# Altium PCB PCB1.PcbDoc (part 4 of 4)
Units mil, origin at the board's own origin, x right, y up, seen from the top; angles counter-clockwise.
Board outline 3912 x 3804 mil, 4 copper layers (Top Layer, Layer 2, Layer 3, Bottom Layer), stack 23.756 mil thick; 248 components, 329 nets, 1182 pads, 457 vias.
Unrouted connection lines stored in the file: 4.
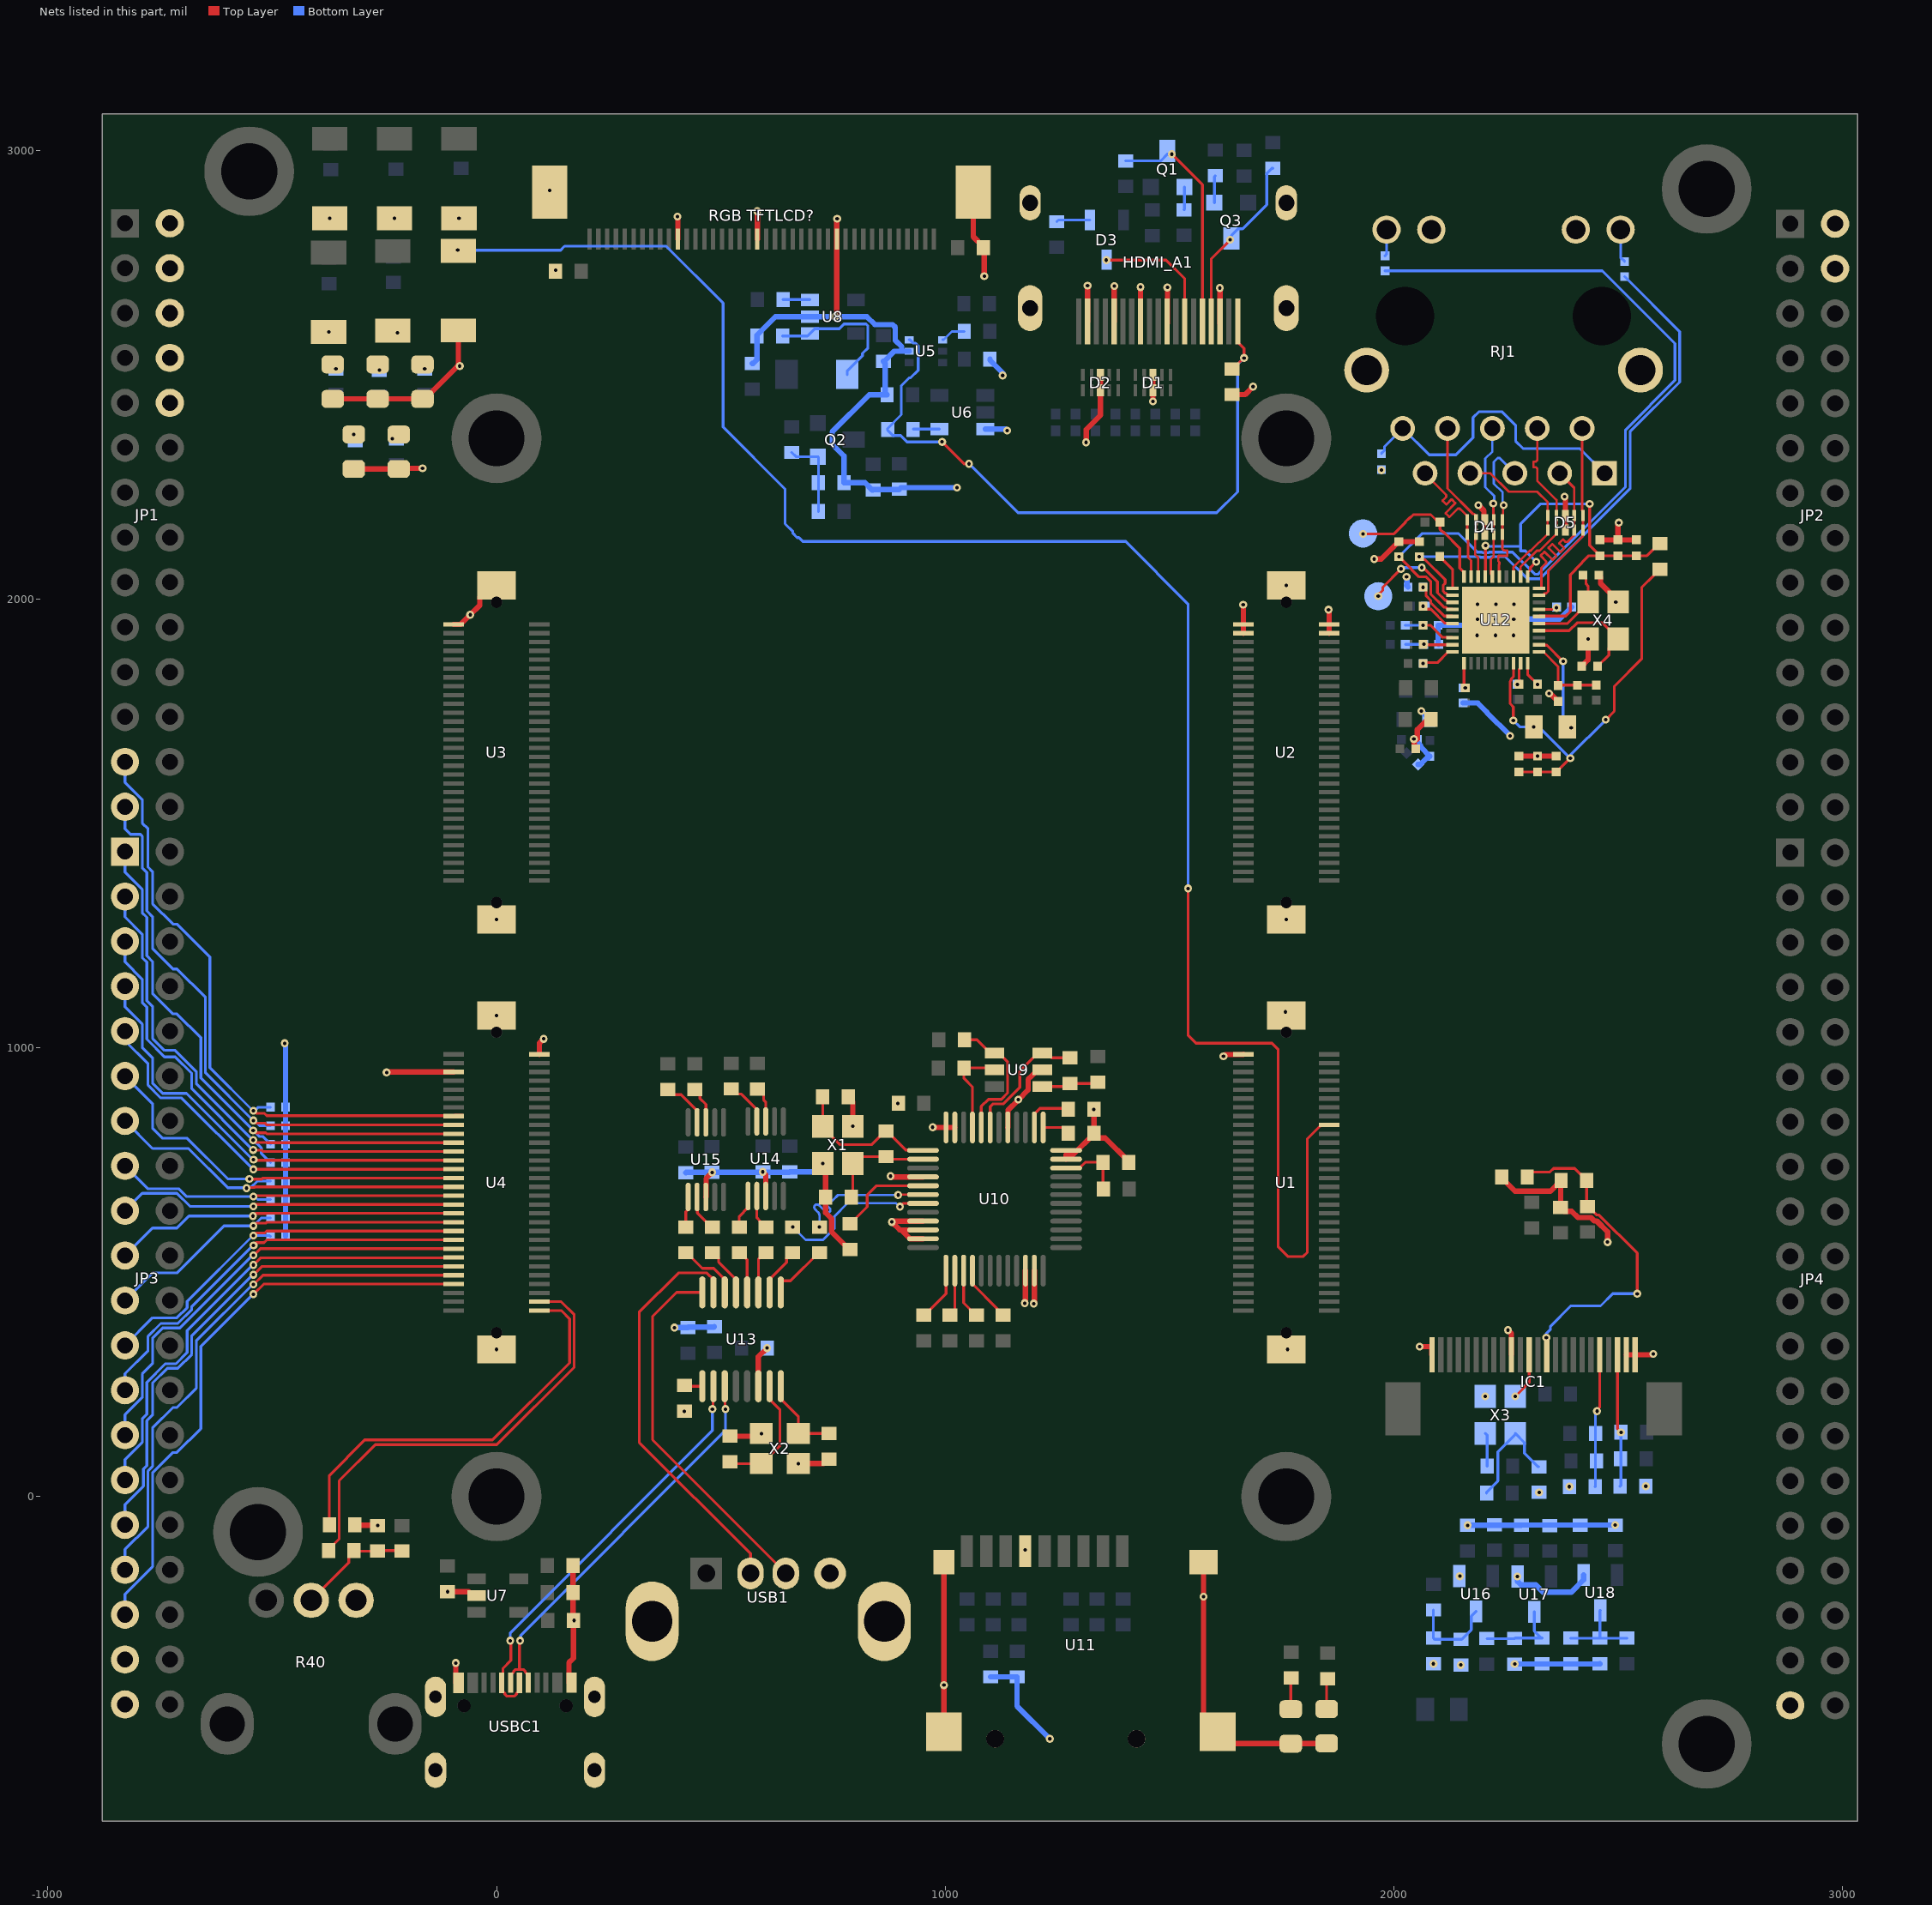
[diagram p6: the nets of this part, all layers, seen from the top]

## Via types
v1: diameter 17.7, hole 7.9, Top Layer to Bottom Layer, tented both sides, 445 vias
v2: diameter 17.7, hole 7.9, Top Layer to Bottom Layer, 12 vias

## Nets (pads, with @x,y where several pads share a name; then routed paths per layer and width w, separated by ;. In a path a pad name is that pad's centre, name@x,y a point inside that pad or via, vN(x,y) a via of type N, cw(c..) or ccw(c..) an arc to the next point about the centre after c; other vN are vias at no path point) (continued)
GND: 1.1 2.1 3.1 4.1 5.1 6.1 7.1 8.1 9.1 10.1 11.1 12.1 13.1 14.1 15.1 16.1 17.1 18.1 "RGB TFTLCD?.11" "RGB TFTLCD?.20" "RGB TFTLCD?.29" "RGB TFTLCD?.A" "RGB TFTLCD?.B" C1.2 C2.1 C3.1 C4.1 C5.1 C6.2 C7.2 C8.1 C9.1 C10.1 C12.1 C13.1 C14.2 C15.1 C16.1 C17.2 C18.2 C19.1 C20.2 C21.1 C22.1 C23.1 C24.1 C25.2 C26.1 C27.1 C28.1 C29.1 C30.1 C31.2 C32.2 C33.1 C34.1 C35.1 C36.1 C37.1 C38.1 C39.1 C40.1 C41.1 C42.2 C43.2 C44.2 C45.2 C46.1 C47.1 C48.1 D1.3 D1.8 D2.3 D2.8 D4.3 D4.8 D5.3 D5.8 HDMI_A1.2 HDMI_A1.5 HDMI_A1.8 HDMI_A1.11 HDMI_A1.17 HDMI_A1.20 HDMI_A1.21 HDMI_A1.22 HDMI_A1.23 IC1.1 IC1.2 IC1.15 IC1.24 JP1.2 JP1.4 JP1.6 JP1.8 JP1.10 JP2.2 JP2.4 JP3.37 JP3.39 JP4.39 LED1.2 LED2.2 LED3.2 LED4.2 LED5.2 LED6.2 LED7.2 R11.1 R15.1 R28.1 R40.1 R47.1 R58.1 R60.2 R88.1 R89.1 R90.1 R91.1 R92.1 R93.1 R94.1 R95.1 R97.2 R99.2 R102.1 R104.1 R107.2 R108.2 RJ1.12 RJ1.13 RJ1.B01 RJ1.B02 SW1.1 SW2.1 SW3.1 SW4.1 SW5.1 SW6.1 U1.59 U1.61 U1.62 U2.57 U2.58 U2.59 U2.60 U2.61 U2.62 U3.59 U3.61 U3.62 U4.55 U4.60 U4.61 U4.62 U5.2 U6.3 U7.2 U8.2 U9.2 U10.4 U10.9 U10.10 U10.11 U10.22 U10.23 U10.35 U10.36 U10.41 U10.47 U10.48 U11.0 U11.6 U12.41 U13.14 U14.3 U15.3 U16.1 U17.1 U18.1 USB1.4 USBC1.0 USBC1.A1 USBC1.A12 USBC1.B1 USBC1.B12 X1.2 X1.4 X2.2 X2.4 X3.2 X4.2 X4.4 | length 10092.5
  Top Layer w12: LED7.2@-365,2445.73 LED3.2@-265,2445.73 LED4.2@-165,2445.73 -160,2445.73 -87.82,2517.91 -83.09,2517.91 v1(-82,2519) -85,2522 SW6.1@-85,2598.41 ; LED6.2@-318,2289.6 LED5.2@-218,2289.6 -216.6,2291 v1(-165,2291) ; R47.1@-315.46,-63 -314.73,-63.73 -265.73,-63.73 v1(-265,-64.46) ; v1(-245,945) -243.95,946.05 U4.55@-95.46,946.05 ; v1(-109.31,-211.87) -62.25,-211.87 -53.65,-220.46 U7.2@-44.8,-220.46 ; U3.59@-95.46,1943.42 -79.9,1943.42 v1(-58.6,1964.72) -37.31,1986.02 -37.31,2004.55 -11.81,2030.05 U3.62@0,2030.05 ; USBC1.A1@-90.68,-414.82 v1(-90.68,-370.68) ; U4.60@95.47,985.42 95.47,1010.47 v1(105,1020) ; v1@118.55,2906.43 v1(118.55,2910.45) ; C40.1@131.46,2730 v1(131.46,2732.54) ; USBC1.B1@161.29,-414.76 161.29,-370 171.24,-360.05 C16.1@171.24,-275.87 v1(172.9,-275.87) ; C5.1@170.24,-153.87 170.74,-154.37 C16.1@170.74,-275.37 ; v1(403,2852) 403.98,2851.02 403.98,2802 ; v1(418.53,190) R58.1@418.53,190.46 ; U15.3@466.53,667.75 467.01,668.24 467.01,708.94 v1(480.53,722.46) ; C31.2@520.07,134.66 584.31,134.66 v1(590.12,140.46) ; v1(581,2864) 581.15,2863.85 581.15,2802 ; U13.14@583.53,246 583.53,311.46 v1(603.07,331) ; v1(593.53,723.46) 599.84,717.14 U14.3@599.84,669.75 ; v1(672.79,73.54) 729.07,73.54 739.1,83.57 C32.2@741.07,83.57 ; X1.4@733.46,735.87 C6.2@733.46,667 733.46,632.45 746.46,619.45 746.46,590.16 786.03,550.58 R28.1@788,550.58 ; v1(754.7,2629) 754.7,2630.54 758.31,2634.16 758.31,2802 758.31,2846.31 v1(759,2847) ; C7.2@784.09,891 784.09,889.03 793.93,879.19 v1(793.93,825) ; v1(878,714) 879.67,712.33 U10.4@950.43,712.33 ; v1(894,876) C4.1@895.46,876 ; U10.11@950.43,574.54 921.49,574.54 901.81,594.22 ; U10.10@950.43,594.22 901.81,594.22 ; U10.9@950.43,613.91 882.91,613.91 v1(881,612) 898.78,594.22 901.81,594.22 ; v1(972,823) 972.43,822.57 U10.48@1001.61,822.57 U10.47@1021.3,822.57 ; U11.0@997,-523.95 v1(997,-420) U11.0@997,-146 ; 1062.43,2906.43 1062.43,2807.08 1084.54,2784.97 C42.2@1084.54,2783 1087,2780.54 v1(1087,2719) ; U11.0@1103.77,-539.7 U11.0@1111.17,-539.7 ; U10.41@1139.41,822.57 1139.9,823.05 1139.9,860.9 1163.03,884.03 v1(1163.03,884.38) 1184.65,906.01 1184.65,929.56 1191.8,936.7 1192.17,936.7 1206.47,951 U9.2@1216.31,951 ; v1(1177,431) 1178.78,432.78 U10.22@1178.78,503.67 ; U11.6@1178.1,-121.32 v1(1178.1,-118.9) ; v1(1197,430) 1198.46,431.46 U10.23@1198.46,503.67 ; U10.35@1269.33,751.7 1269.33,761.54 1284.6,761.54 C18.2@1331.09,808.03 ; v1(1314,2349) 1314,2377.44 1346,2409.44 D2.8@1346,2464.75 D2.3@1346,2499 ; v1(1317,2698) 1317.15,2697.85 HDMI_A1.2@1317.15,2618 ; C17.2@1331.54,863 v1(1331.31,862.77) 1331.31,810.23 C18.2@1331.09,810 C18.2@1331.09,808.03 ; HDMI_A1.5@1376.2,2618 v1@1376.2,2696.2 ; C19.1@1408.54,745 1408.54,746.97 1356.24,799.27 1339.85,799.27 C18.2@1331.09,808.03 ; U11.0@1426.13,-539.7 U11.0@1433.54,-539.7 ; HDMI_A1.8@1435.15,2615 v1@1435.15,2694.85 ; v1(1463,2440) D1.8@1463,2464.75 D1.3@1463,2499 ; HDMI_A1.11@1495.15,2614 v1@1495.15,2693.85 ; U11.0@1575.74,-146 v1(1575.74,-223) 1575.74,-492.46 U11.0@1607.24,-523.95 1633.68,-550.4 LED2.2@1770,-550.4 1770.2,-550.2 1849.8,-550.2 LED1.2@1850,-550 ; HDMI_A1.17@1612.15,2613 v1@1612.15,2692.85 ; v1(1620,981) 1623.9,984.9 1664.01,984.9 U1.59@1664.54,985.42 ; R11.1@1639,2455.46 1668.46,2455.46 v1(1686,2473) ; v1(1664,1987) 1664.54,1986.46 U2.59@1664.54,1943.42 U2.57@1664.54,1923.74 ; U1.61@1760,327.95 v1(1763.05,327.95) ; v1(1854,1976) 1855.47,1974.53 U2.60@1855.47,1943.42 U2.58@1855.47,1923.74 ; v1(1956,2089) 1971.9,2089 1998.31,2115.41 1998.67,2115.41 R97.2@2011,2127.73 R99.2@2056.5,2127.73 ; v1(2044.31,1687.89) 2045.4,1686.8 2045.4,1669.32 C44.2@2048.72,1666 ; v1@2051.72,1687.89 2051.72,1709.05 2071.81,1729.14 2073.78,1729.14 2082.54,1737.91 C43.2@2082.54,1739.87 ; v1(2057,334) 2084.54,334 2084.63,333.91 IC1.24@2084.63,316 ; v1(2188,2209) 2200.57,2196.43 2200.57,2178.43 D4.8@2202.44,2176.56 D4.3@2202.44,2144.15 ; 1.1@2239.91,712 2239.91,710.03 2269.64,680.31 2348.76,680.31 2361.72,693.27 2363.69,693.27 2.1@2371.73,701.3 ; v1(2254,371) 2261.7,363.3 2261.7,316.09 IC1.15@2261.79,316 ; C34.1@2278.5,1649.84 v1(2320,1649.84) C33.1@2361.5,1649.84 ; v1(2345.91,1789.38) 2346.19,1789.38 2347.2,1790.38 C41.1@2365.87,1771.71 ; 2.1@2372.46,704 2371.73,703.27 2.1@2371.73,701.3 ; v1(2380,2228) 2382,2226 D5.8@2382,2186 D5.3@2382,2153.6 ; C39.1@2418.28,1850 2432.49,1864.21 v1(2432.49,1910.6) ; C38.1@2456.72,2053 2460.56,2049.16 2460.56,2034.1 2499.42,1995.24 X4.2@2499.42,1993.28 v1(2494.28,1993.28) ; C30.1@2459.13,2131.72 C29.1@2499,2131.72 ; v2(2476,567) 2476,590.09 2451.87,614.22 2446.79,614.22 2439.23,621.78 2410.13,621.78 2396.13,635.78 2379.76,635.78 3.1@2371,644.54 2371.73,645.27 2.1@2371.73,701.3 ; v1(2501,2170) 2499,2168 C29.1@2499,2131.72 ; IC1.2@2517.7,316 2537.24,316 IC1.1@2537.3,315.94 2575.94,315.94 v1(2578,318) ; C28.1@2540.13,2131.72 C29.1@2499,2131.72
  Bottom Layer w12: v1(-472,1010) -470,1008 R88.1@-470,867.57 R89.1@-470,826.43 R90.1@-470,785.29 R91.1@-470,744.14 R92.1@-470,703 R94.1@-470,620.71 R95.1@-470,579.57 ; v1(396.54,376.54) C23.1@426.53,376.54 427.53,377.54 484.53,377.54 C24.1@485.53,378.54 ; C27.1@421.65,721.46 422.65,722.46 v1(480.53,722.46) 652.53,722.46 C36.1@653.53,723.46 707.89,723.46 726.76,742.32 v1(727,742.32) ; C8.1@569.87,2524.54 571.57,2524.54 580.33,2533.31 C9.1@580.33,2586 580.33,2587.97 621.36,2629 U8.2@698.41,2629 v1(754.7,2629) 825.35,2629 843.04,2611.31 882.75,2611.31 888.61,2605.45 888.61,2576.44 902.99,2562.06 902.99,2552 ; U5.2@919.6,2552 902.99,2552 ; v1(1026,2248) 901.54,2248 C13.1@898,2244.46 897.23,2243.69 839.77,2243.69 C12.1@839,2242.91 837.03,2242.91 820.94,2259 R15.1@774.54,2259 774.54,2318.59 748,2345.14 748,2372.36 830.64,2455 C2.1@870.46,2455 866.17,2459.29 866.17,2525.17 C3.1@861.87,2529.46 863.84,2529.46 886.39,2552 902.99,2552 ; U6.3@1089.18,2378.6 1134.4,2378.6 v1(1138,2375) ; C1.2@1099.54,2534 1099.54,2532.03 1128,2503.57 v1(1128,2498) ; C21.1@1101,-401.54 C22.1@1160,-401.54 1160,-466.7 v1(1233,-539.7) ; v1(1972,2287) C14.2@1972,2288.28 ; v1(2028,2049.19) 2029.09,2048.1 2029.09,2030.34 2028.78,2030.04 2028,2030.04 R107.2@2031.54,2026.5 ; C47.1@2046.72,1686.87 2045.7,1687.89 v1(2044.31,1687.89) 2060.16,1672.04 2060.16,1669.13 C45.2@2080,1649.28 2076.16,1645.44 2072.93,1645.44 2058.96,1631.47 C48.1@2053.53,1631.47 ; v1(2061.05,1750.46) C46.1@2079.51,1732 ; R102.1@2099.55,1899 2098.17,1900.38 R104.1@2098.17,1941.5 2170.96,1941.5 2184.46,1955 v1(2186,1955) ; U16.1@2145.6,-177.26 v1(2146.74,-177.26) ; R108.2@2154,1768.27 2186.83,1768.27 2207,1748.1 2207,1747 v1(2259,1695) ; v1(2164,-64) 2164.27,-63.73 2283.73,-63.73 14.1@2284,-63.46 17.1@2415,-63.46 v1(2493,-63.46) ; v1(2267,1955) 2369.09,1955 2383.4,1969.31 2383.4,1969.67 R60.2@2395.73,1982 ; v1(2269,-373.09) 2269.27,-372.82 2458.73,-372.82 15.1@2459,-372.54 ; v1(2275.2,-178) 2275.2,-188.83 2282.98,-196.61 2316.08,-196.61 2332.08,-212.61 2395.39,-212.61 2422.51,-185.48 U18.1@2422.51,-174.66 ; 5.1@2323,9.46 v1(2323.46,9.46) ; v1(2345.91,1789.38) v1@2346.83,1790.3
  other v1: 2149,-375.09 2088,-372.54 2391,22.13 2561.09,23.13 2203.54,223.34 0,327.95 0,1072.05 1758,1080 0,1285.95 1760,1285.95 2185.5,1919 2226,1919 2266.5,1919 2226.5,1955 2186.5,1988 2227,1988 2267.5,1988 1760,2030.05 -221,2593 -374,2594.83 1612,2693 1495,2694 1435,2695 1377,2697 -371.91,2848.25 -227.74,2848.25 -83.57,2848.25
HDMI_SCL_LS: HDMI_A1.15 Q1.3 R20.2 | length 510.4
  Top Layer w6.16: v1(1504.99,2991.01) 1573.06,2922.94 HDMI_A1.15@1573.06,2618
  Bottom Layer w6.16: R20.2@1402,2976.09 1480.08,2976.09 1495,2991.01 v1(1504.99,2991.01)
HDMI_SDA_LS: HDMI_A1.16 Q3.3 R29.2 | length 401.4
  Top Layer w6.16: HDMI_A1.16@1592.74,2618 1592.74,2757.97 v1(1635,2800.23)
  Bottom Layer w6.16: Q3.3@1637.79,2803.02 1637.79,2810.02 1652.71,2824.94 1662.73,2824.94 1716.35,2878.56 1716.35,2947.77 1728.03,2959.46 R29.2@1730,2959.46
JTAG_DM: R71.2 U10.6 | length 351.3
  Top Layer w5.24: v1(895,672) 895.96,672.96 U10.6@950.43,672.96
  Bottom Layer w5.24: v1(719.73,600.54) 719.73,622.57 719.73,626.27 ; 719.73,626.32 ccw(c709.28,626.27) 716.69,633.64 709.85,640.48 cw(c714.18,644.81) 709.85,649.13 cw(c714.18,644.81) 718.5,649.13 733.61,634.03 ccw(c737.94,638.35) 742.26,634.03 ccw(c737.94,638.35) 742.26,642.68 732.64,652.3 cw(c736.97,656.63) 732.64,660.96 cw(c736.97,656.63) 741.3,660.96 ccw(c745.63,665.28) 749.96,660.96 761,672 762,672 v1(895,672)
JTAG_DP: R69.2 U10.7 | length 358.1
  Top Layer w5.24: v1(899,646) 906.28,653.28 U10.7@950.43,653.28
  Bottom Layer w5.24: v1(660.13,600.54) 688.67,572 727.6,572 753,597.4 753,624.13 782.87,654 889.7,654 897.7,646 v1(899,646)
JTAG_ROM_CLK: R22.2 U9.4 U10.44 | length 303.9
  Top Layer w6.16: R22.2@1043,1018 1070.56,1018 1100.16,988.4 U9.4@1110,988.4 1119.84,988.4 1138.73,969.51 1138.73,898.86 1124.88,885 1096,885 1080.35,869.35 U10.44@1080.35,822.57
JTAG_ROM_CS: R24.2 U9.5 U10.45 | length 210.5
  Top Layer w6.16: U10.45@1060.67,822.57 1060.67,912.33 1041.54,931.46 R24.2@1041.54,955 1106,955 U9.5@1110,951
JTAG_ROM_DATA: R19.1 U9.3 U10.43 | length 299.6
  Top Layer w6.16: U10.43@1100.04,822.57 1100.04,869.04 1105.84,874.84 1129.08,874.84 1166,911.76 1166,947.93 1206.47,988.4 U9.3@1216.31,988.4 1226.15,988.4 1237.01,977.54 R19.1@1278,977.54
LED_10_100: R96.1 U12.21 | length 82.5
  Top Layer w6.16: R96.1@2102,2094.54 2130.54,2065.99 U12.21@2130.54,2023.87
LED_1000: R25.1 R99.1 U12.22 | length 1274.3
  Top Layer w6.16: v1(2056.5,2094.27) 2063.26,2087.51 2069.49,2087.51 2113.83,2043.17 2113.83,2034.88 2109.68,2030.74 2109.68,2017 2113.83,2012.85 2115.97,2012.85 2119.84,2008.98 2129.69,2008.98 U12.22@2130.54,2008.12
  Bottom Layer w6.16: v1(2056.5,2094.27) 2191.68,2094.27 2193.19,2092.75 2214.81,2092.75 2216.32,2094.27 2248.13,2094.27 2297.34,2045.06 2325.43,2045.06 2526.16,2245.79 2526.16,2372.79 2636.56,2483.19 2636.56,2595.71 R25.1@2514,2718.27
LED_ACT: R26.1 R97.1 U12.24 | length 1908.8
  Top Layer w6.16: v1(2011,2094.27) 2022.28,2082.99 2056.1,2049.18 2072.02,2049.18 2081.92,2039.28 2081.92,2011.14 2111.71,1981.35 2115.97,1981.35 2119.84,1977.48 2129.69,1977.48 U12.24@2130.54,1976.62
  Bottom Layer w6.16: R26.1@1980,2731.27 2464.2,2731.27 2626.4,2569.07 2626.4,2487.4 2516,2377 2516,2250 2321.22,2055.22 2313.63,2055.22 2264.42,2104.43 2212.11,2104.43 2210.6,2102.91 2197.4,2102.91 2195.89,2104.43 2185.34,2104.43 2144.18,2145.59 2062.32,2145.59 v1(2011,2094.27)
MGT_CLK0_N: JP3.31 U4.11 | length 1144.6
  Top Layer w6.16: v1(-542,494.44) -541.17,494.44 -522.63,512.98 U4.11@-95.47,512.98
  Bottom Layer w6.16: JP3.31@-828,-63 -828,-17.55 -786.9,23.55 -786.9,61.4 -779.26,69.03 -779.26,169.03 -766.58,181.72 -766.58,252.98 -733.82,285.74 -710.34,285.74 -679.26,316.81 -679.26,358.41 -543.24,494.44 v1(-542,494.44)
MGT_CLK0_P: JP3.29 U4.13 | length 1064.7
  Top Layer w6.16: v1(-542,516.14) -541.18,516.14 -525.15,532.17 U4.13@-96.06,532.17
  Bottom Layer w6.16: JP3.29@-828,37 -828,82.45 -789.42,121.02 -789.42,173.24 -779.26,183.4 -779.26,254.66 -738.03,295.9 -714.55,295.9 -689.42,321.02 -689.42,369.95 -543.24,516.14 v1(-542,516.14)
MGT_CLK1_N: JP3.19 U4.23 | length 771.5
  Top Layer w6.16: v1(-542.83,625.05) -542,625.05 -536.23,630.82 -512.27,630.82 -512,631.09 U4.23@-95.46,631.09
  Bottom Layer w6.16: JP3.19@-828,537 -766.58,598.42 -712.02,598.42 -685.4,625.05 v1(-542.83,625.05)
MGT_CLK1_P: JP3.17 U4.25 | length 762.1
  Top Layer w6.16: v1(-542,646.75) -537.97,650.78 U4.25@-95.46,650.78
  Bottom Layer w6.16: JP3.17@-828,637 -789.42,675.58 -712.02,675.58 -683.19,646.75 v1(-542,646.75)
MGT_RX_N_0: JP3.1 R90.2 U4.41 | length 1254.6
  Top Layer w6.16: v1@-549.71,814.11 -544.21,814.11 -542,816.32 -536.23,810.55 -514.29,810.55 -512,808.26 U4.41@-95.46,808.26
  Bottom Layer w6.16: JP3.1@-828,1437 -828,1391.55 -789.42,1352.98 -789.42,1300.76 -779.26,1290.6 -779.26,1204.97 -766.58,1192.28 -766.58,1121.02 -721.13,1075.58 -712.02,1075.58 -658.94,1022.5 -658.94,932.43 v1(-542.41,815.9) ; v1@-542,816.32 -527.98,802.3 -520.48,802.3 R90.2@-503.46,785.29
MGT_RX_N_1: JP3.15 R93.2 U4.27 | length 820.5
  Top Layer w6.16: v1(-542,668.45) -539.99,670.46 U4.27@-95.46,670.46 U4.27@-77.74,670.46
  Bottom Layer w6.16: JP3.15@-828,737 -776.74,685.74 -707.81,685.74 -690.52,668.45 v1(-542,668.45) -538.88,668.45 -532.29,661.86 R93.2@-503.72,661.86
MGT_RX_N_2: JP1.25 R88.2 U4.45 | length 1415.9
  Top Layer w6.16: v1(-542,859.72) -536.23,853.95 -517.4,853.95 -512,848.55 U4.45@-94.54,848.55 ; U4.45@-95.46,847.63 U4.45@-94.54,848.55 ; U4.45@-75.73,849.47 -93.62,849.47 U4.45@-94.54,848.55
  Bottom Layer w6.16: JP1.25@-828,1637 -828,1591.55 -789.42,1552.98 -789.42,1500.76 -776.74,1488.08 -776.74,1402.44 -766.58,1392.28 -766.58,1321.02 -721.13,1275.58 -712.02,1275.58 -638.62,1202.18 -638.62,955.51 -542.83,859.72 v1(-542,859.72) -538.88,859.72 -531.02,867.57 R88.2@-503.46,867.57
MGT_RX_N_3: JP3.23 R95.2 U4.19 | length 891.4
  Top Layer w6.16: v1@-545.12,581.65 v1(-542,581.65) -536.23,587.42 -516.31,587.42 -512,591.72 U4.19@-95.47,591.72 U4.19@-93.63,589.88
  Bottom Layer w6.16: JP3.23@-828,337 -766.58,398.42 -712.02,398.42 -689.42,421.02 -689.42,435.05 -542.83,581.65 v1(-542,581.65) -505.54,581.65 R95.2@-503.46,579.57
MGT_RX_P_0: JP3.3 R91.2 U4.39 | length 1191
  Top Layer w6.16: v1(-542.41,794.2) -541.59,794.2 -536.23,788.85 -512.28,788.85 -512,788.57 U4.39@-95.46,788.57
  Bottom Layer w6.16: JP3.3@-828,1337 -828,1291.55 -789.42,1252.98 -789.42,1200.76 -779.26,1190.6 -779.26,1104.97 -766.58,1092.28 -766.58,1021.02 -739.74,994.18 -716.26,994.18 -669.1,947.03 -669.1,920.06 -543.24,794.2 v1(-542.41,794.2) ; v1@-542,794.62 -524.23,776.85 -524.23,764.91 R91.2@-503.46,744.14
MGT_RX_P_1: JP3.13 R92.2 U4.29 | length 856.3
  Top Layer w6.16: v1(-557.28,687.11) -555.49,688.91 -538.91,688.91 -537.67,690.15 U4.29@-95.46,690.15
  Bottom Layer w6.16: JP3.13@-828,837 -766.58,775.58 -686.58,775.58 -599,688 -558.16,688 v1(-557.28,687.11) -555.07,689.32 -546.74,689.32 -533.06,703 R92.2@-503.46,703
MGT_RX_P_2: JP1.27 R89.2 U4.43 | length 1330.1
  Top Layer w6.16: v1(-542,838.02) -536.23,832.25 -516.3,832.25 -512,827.94 U4.43@-95.46,827.94
  Bottom Layer w6.16: JP1.27@-828,1537 -828,1488.1 -815.47,1475.58 -793.57,1475.58 -789.42,1471.43 -789.42,1400.76 -779.26,1390.6 -779.26,1304.97 -766.58,1292.28 -766.58,1221.02 -721.13,1175.58 -712.02,1175.58 -648.78,1112.34 -648.78,943.97 -542.83,838.02 v1(-542,838.02) -539.59,838.02 -528.01,826.43 R89.2@-503.46,826.43
MGT_RX_P_3: JP3.21 R94.2 U4.21 | length 853.1
  Top Layer w6.16: v1(-542,603.35) -536.23,609.12 -514.29,609.12 -512,611.4 U4.21@-95.47,611.4 U4.21@-93.63,613.25
  Bottom Layer w6.16: JP3.21@-828,437 -766.58,498.42 -712.02,498.42 -607.1,603.35 v1(-542,603.35) -524.63,620.71 R94.2@-503.46,620.71
MGT_TX_N_0: JP3.9 U4.33 | length 900.6
  Top Layer w6.16: v1(-542.01,729.11) -541.8,729.31 -95.67,729.31 U4.33@-95.46,729.52
  Bottom Layer w6.16: JP3.9@-828,1037 -828,1015.52 -776.74,964.25 -776.74,916.81 -748.19,888.26 -701.58,888.26 -542.42,729.11 v1(-542.01,729.11)
MGT_TX_N_1: JP3.35 U4.7 | length 1294
  Top Layer w6.16: v1(-542,451.04) -541.17,451.04 -518.6,473.61 U4.7@-95.47,473.61
  Bottom Layer w6.16: JP3.35@-828,-263 -828,-217.55 -766.58,-156.13 -766.58,52.98 -721.13,98.42 -712.02,98.42 -658.94,151.5 -658.94,334.5 -542.41,451.04 v1(-542,451.04)
MGT_TX_N_2: JP3.5 U4.37 | length 1045.5
  Top Layer w6.16: v1(-542.41,772.5) -541.88,771.97 -523.5,771.97 -520.42,768.89 U4.37@-95.46,768.89
  Bottom Layer w6.16: JP3.5@-828,1237 -828,1191.55 -789.42,1152.98 -789.42,1100.76 -779.26,1090.6 -779.26,1019.34 -739.74,979.82 -716.26,979.82 -679.26,942.82 -679.26,908.52 -543.24,772.5 v1(-542.41,772.5)
MGT_TX_N_3: JP3.27 U4.15 | length 995.1
  Top Layer w6.16: v1(-542.01,537.84) -540.75,537.84 -526.24,552.35 U4.15@-95.47,552.35
  Bottom Layer w6.16: JP3.27@-828,137 -828,182.45 -789.42,221.02 -789.42,273.24 -766.58,296.08 -766.58,352.98 -743.98,375.58 -705.5,375.58 -543.24,537.84 v1(-542.01,537.84)
MGT_TX_P_0: JP3.11 U4.31 | length 860.6
  Top Layer w6.16: v1(-550.77,707.82) -550.36,707.41 -523.25,707.41 -520.83,709.83 U4.31@-95.47,709.83
  Bottom Layer w6.16: JP3.11@-828,937 -766.58,875.58 -766.58,821.02 -743.98,798.42 -689.42,798.42 -598.82,707.82 v1(-550.77,707.82)
MGT_TX_P_1: JP3.33 U4.9 | length 1215.3
  Top Layer w6.16: v1(-542,472.74) -541.17,472.74 -520.61,493.3 U4.9@-95.47,493.3
  Bottom Layer w6.16: JP3.33@-828,-163 -828,-117.55 -776.74,-66.29 -776.74,57.19 -766.58,67.35 -766.58,152.98 -721.13,198.42 -712.02,198.42 -669.1,241.34 -669.1,346.87 -543.24,472.74 v1(-542,472.74)
MGT_TX_P_2: JP3.7 U4.35 | length 983.7
  Top Layer w6.16: v1(-541.59,750.8) -539.99,749.2 U4.35@-95.46,749.2
  Bottom Layer w6.16: JP3.7@-828,1137 -828,1091.55 -789.42,1052.98 -789.42,1000.76 -766.58,977.92 -766.58,921.02 -743.98,898.42 -690.86,898.42 -543.24,750.8 v1(-541.59,750.8)
MGT_TX_P_3: JP3.25 U4.17 | length 916.1
  Top Layer w6.16: v1(-541.59,559.53) -541.59,560.36 -536.23,565.72 -518.32,565.72 -512,572.04 U4.17@-95.47,572.04
  Bottom Layer w6.16: JP3.25@-828,237 -828,273.95 -776.74,325.21 -776.74,357.19 -748.19,385.74 -710.34,385.74 -679.26,416.81 -679.26,423.51 -543.24,559.53 v1(-541.59,559.53)
Net1_2: 1.2 2.2 FB1.2 IC1.11 | length 703.5
  Top Layer w6.16: 1.2@2289.64,712.82 1.2@2291.03,714.21 ; 1.2@2298.58,723.21 2347.65,723.21 2355.44,731 2402.54,731 2415.89,717.65 2417.86,717.65 2429.54,705.97 2.2@2429.54,704 2429.54,649.97 FB1.2@2431.98,647.53 ; FB1.2@2431,646.54 2432.97,646.54 2452.21,627.3 2457.29,627.3 2542,542.59 v2(2542,452)
  Bottom Layer w6.16: v1(2339.61,354.39) 2338.9,355.09 2338.9,362.7 2348.71,372.51 2348.71,379.71 2394,425 2460.43,425 2487.43,452 v2(2542,452)
Net4_2: 4.2 IC1.5 R83.1 R87.1 | length 298.2
  Top Layer w6.16: v1(2452.42,190.29) 2452.42,193.41 2458.64,199.63 IC1.5@2458.64,316
  Bottom Layer w6.16: 4.2@2448.09,22.13 2449.09,23.13 R87.1@2449.09,141.13 2449.09,186.95 v1(2452.42,190.29)
Net5_2: 5.2 FB3.2 X3.4 | length 256.2
  Bottom Layer w6.16: FB3.2@2206.46,8 2206.46,9.97 2231.49,35 2231.49,99.72 2270.46,138.69 X3.4@2270.46,140.66 2291.01,120.12 2291.01,96.57 2321.03,66.54 5.2@2323,66.54
Net6_2: 6.2 IC1.3 R85.1 R86.1 | length 297
  Top Layer w6.16: IC1.3@2498.01,316 2498.01,151.12 v1(2506,143.13)
  Bottom Layer w6.16: 6.2@2504,23.13 2506,25.13 v1(2506,143.13)
Net7_2: 7.2 8.2 FB4.1 U16.3 | length 202.2
  Bottom Layer w6.16: FB4.1@2088,-252.54 8.2@2088,-315.46 2090.54,-318 7.2@2149,-318 2150.97,-318 2172.3,-296.67 2172.3,-266.7 U16.3@2183,-256
Net11_2: 11.2 12.2 FB5.1 U17.3 | length 188.3
  Bottom Layer w6.16: FB5.1@2207,-316.46 2268.54,-316.46 11.2@2269,-316 2270,-315 12.2@2328.03,-315 ; U17.3@2312.6,-256.74 2312.6,-299.57 12.2@2328.03,-315 ; 12.2@2330,-315 12.2@2328.03,-315
Net15_2: 15.2 16.2 FB8.1 U18.3 | length 187.4
  Bottom Layer w6.16: 16.2@2394,-315.46 15.2@2459,-315.46 ; U18.3@2459.91,-253.39 2459,-254.31 15.2@2459,-315.46 ; FB8.1@2519,-315.46 15.2@2459,-315.46
NetC6_1: C6.1 R23.1 U10.2 X1.1 | length 241.9
  Top Layer w6.16: C6.1@790.54,667 793.93,670.39 X1.1@793.93,742.32 809.06,757.46 R23.1@868,757.46 873.76,751.7 U10.2@950.43,751.7
NetC7_1: C7.1 R23.2 U10.1 X1.3 | length 338.1
  Top Layer w6.16: C7.1@727,891 X1.3@727,825 727,823.03 766.03,784 835.49,784 866.03,814.54 R23.2@868,814.54 869.97,814.54 912.19,772.32 949.5,772.32 U10.1@950.43,771.39
NetC9_2: C9.2 F1.1 U8.1 | length 330.2
  Bottom Layer w6.16: C9.2@637.42,2586 692.81,2586 709.11,2602.3 764.13,2602.3 774.29,2612.46 823.39,2612.46 827.54,2608.31 827.54,2559.26 815.42,2547.14 815.42,2541.54 781.37,2507.5 F1.1@781.37,2500
NetC11_2: C11.2 Q2.1 R15.2 R16.1 | length 184.5
  Bottom Layer w6.16: C11.2@658,2326.46 667.46,2317 Q2.1@716,2317 717.46,2315.54 R15.2@717.46,2259 R16.1@717.46,2195
NetC14_1: C14.1 RJ1.1 RJ1.10 | length 693.7
  Bottom Layer w6.16: C14.1@1972,2323.72 1978.76,2330.48 1978.76,2339.47 RJ1.10@2019.29,2380 2078.29,2321 2138,2321 2176,2359 2176,2404 2189,2417 2241,2417 2271,2387 2271,2352 2288,2335 2414.29,2335 RJ1.1@2469.29,2280
NetC17_1: C17.1 U10.38 | length 112
  Top Layer w6.16: U10.38@1198.46,822.57 1198.46,852.49 1211.06,865.08 1237.83,865.08 1237.88,865.03 1272.43,865.03 C17.1@1274.46,863
NetC18_1: C18.1 U10.37 | length 61.6
  Top Layer w6.16: U10.37@1218.15,822.57 1262.32,822.57 1274,810.88 C18.1@1274,810
NetC19_2: C19.2 R32.1 U10.34 | length 147.9
  Top Layer w6.16: U10.34@1269.33,732.02 1299.25,732.02 1312.24,745 C19.2@1351.46,745 1351.46,686 R32.1@1352.46,685
NetC20_1: C20.1 R37.1 R39.1 R40.2 | length 255.7
  Top Layer w6.16: R40.2@-413,-231 -329.14,-147.14 -329.14,-131.68 R39.1@-318.44,-120.98 ; R39.1@-316.15,-123.27 -314.43,-121.54 C20.1@-265,-121.54 ; C20.1@-265,-120 -212.54,-120 R37.1@-211,-121.54
NetC28_2: C28.2 C29.2 C30.2 FB2.1 U12.6 U12.11 U12.17 | length 978.3
  Top Layer w6.16: U12.17@2203.38,2049.46 2203.69,2049.77 2203.69,2118.53 v1(2204,2118.84) ; U12.11@2297.87,2049.46 2297.87,2059.3 2304.21,2065.64 2304.21,2070.21 v1(2317,2083) ; U12.6@2323.46,1960.87 2324.31,1961.73 2337.64,1961.73 2337.76,1961.86 2382.89,1961.86 2393.02,1971.98 2393.02,2053.44 2404.36,2064.79 2404.36,2066.36 2434.28,2096.28 C30.2@2459.13,2096.28 ; v1(2436,2212) 2436,2119.41 C30.2@2459.13,2096.28 ; FB2.1@2593,2123.54 2591.03,2123.54 2563.77,2096.28 C28.2@2540.13,2096.28 C29.2@2499,2096.28 C30.2@2459.13,2096.28
  Bottom Layer w6.16: v1(2204,2118.84) 2205.84,2117 2282,2117 ; v1(2317,2083) 2293,2107 2282,2107 2282,2117 ; v1(2436,2212) 2327,2212 2282,2167 2282,2117
NetC31_1: C31.1 U13.15 X2.3 | length 272
  Top Layer w6.16: C31.1@520.07,77.57 524.11,73.54 X2.3@590.12,73.54 592.08,73.54 631.45,112.91 631.45,194.35 608.53,217.28 U13.15@608.53,246
NetC32_1: C32.1 U13.16 X2.1 | length 190.2
  Top Layer w6.16: U13.16@633.53,246 633.53,217.28 672.79,178.01 X2.1@672.79,140.46 672.99,140.66 C32.1@741.07,140.66
NetC33_2: C33.2 C34.2 C35.2 FB2.2 L1.2 U12.38 | length 922.4
  Top Layer w6.16: v1(2265.91,1729.11) 2265.91,1759.66 2258.8,1766.77 2258.8,1816.33 2260.78,1818.31 2260.78,1821.21 2266.37,1826.8 U12.38@2266.37,1856.54 ; C34.2@2278.5,1614.41 C35.2@2320,1614.41 C33.2@2361.5,1614.41 2392.09,1645 v1(2393,1645) ; v1(2472,1731) 2491,1750 2491,1805 2552,1866 2552,2025.46 2579.35,2052.8 2579.35,2054.77 2591.03,2066.46 FB2.2@2593,2066.46
  Bottom Layer w6.16: v1(2265.91,1729.11) 2280.02,1715 v1(2311.6,1715) 2313.81,1712.79 2325.21,1712.79 v1(2393,1645) ; v1@2392.05,1651.05 v1(2472,1731)
NetC38_2: C38.2 U12.5 X4.3 | length 194.5
  Top Layer w6.16: U12.5@2323.46,1945.13 2386.31,1945.13 2432.49,1991.31 2432.49,2028.79 2428.05,2033.23 2428.05,2046.24 C38.2@2421.28,2053
NetC39_2: C39.2 U12.4 X4.1 | length 279
  Top Layer w6.16: U12.4@2323.46,1929.38 2390.33,1929.38 2407.95,1947 2464.98,1947 2499.42,1912.57 X4.1@2499.42,1910.6 2478.88,1890.06 2478.88,1875.16 C39.2@2453.72,1850
NetC41_2: C41.2 R98.2 R100.2 U12.1 | length 183.7
  Top Layer w6.16: U12.1@2323.46,1882.13 2333.3,1882.13 2365.87,1849.56 C41.2@2365.87,1807.14 2366.89,1808.16 R98.2@2450.87,1808.16
NetD3_1: D3.1 R9.1 | length 75.2
  Bottom Layer w6.16: R9.1@1248.69,2840.54 1252.43,2844.29 D3.1@1322.28,2844.29
NetD3_3: D3.3 HDMI_A1.13 | length 288.3
  Top Layer w6.16: v1(1359,2755.02) 1492.02,2755.02 1533.69,2713.36 HDMI_A1.13@1533.69,2618
  Bottom Layer w6.16: v1(1359,2755.02) D3.3@1359.69,2755.71
NetHDMI_A1_19: HDMI_A1.19 R11.2 R13.2 U5.3 | length 1547.8
  Top Layer w6.16: v1(993,2350) 1042,2301 v1(1053,2301) ; R11.2@1639,2512.54 1640.97,2512.54 1665.43,2537 v1(1666,2537) 1666,2558.52 1651.8,2572.72 HDMI_A1.19@1651.8,2618
  Bottom Layer w6.16: U5.3@919.6,2577.59 921.6,2577.59 929.19,2570 933.74,2570 939.6,2564.14 939.6,2509.6 922.74,2492.74 919.64,2492.74 902,2475.09 902,2410.51 871.46,2379.97 R13.2@871.46,2378 871.46,2376.03 883.14,2364.35 900.69,2364.35 915.03,2350 v1(993,2350) ; v1(1053,2301) 1162,2192 1605,2192 1651.53,2238.53 1651.53,2522.53 v1(1666,2537)
NetIC1_13: IC1.13 X3.3 | length 105.4
  Top Layer w6.16: v1(2270.46,223.34) 2301.16,254.03 IC1.13@2301.16,316
NetL1_1: L1.1 U12.2 | length 224.3
  Top Layer w6.16: U12.2@2323.46,1897.88 2324.31,1897.02 2340.98,1897.02 v1(2377,1861)
  Bottom Layer w6.16: v1(2377,1861) 2377,1731 v1(2395,1713)
NetLED1_1: LED1.1 R48.1 | length 68
  Top Layer w6.16: LED1.1@1850,-473.2 1850,-408 R48.1@1852,-406
NetLED2_1: LED2.1 R49.1 | length 70.5
  Top Layer w6.16: LED2.1@1770,-473.6 1770,-404.55 R49.1@1771,-403.54
NetLED3_1: LED3.1 R50.1
  other v1: -261,2509.67
NetLED4_1: LED4.1 R51.1
  other v1: -160,2512.67
NetLED5_1: LED5.1 R52.1 | length 18
  Top Layer w6.16: v1(-232.01,2356.87) -227.54,2356.87 LED5.1@-218,2366.4
NetLED6_1: LED6.1 R53.1
  other v1: -318,2366.4
NetLED7_1: LED7.1 R54.1
  other v1: -358,2512.67
NetQ1_1: Q1.1 R17.2 | length 51.3
  Bottom Layer w6.16: R17.2@1532,2867.09 1533,2868.09 Q1.1@1533,2918
NetQ3_1: Q3.1 R27.2 | length 60.9
  Bottom Layer w6.16: Q3.1@1599.79,2883.02 1599.79,2940.79 R27.2@1602,2943
NetR12_1: R12.1 U5.4 | length 55.7
  Bottom Layer w5.24: U5.4@994.4,2577.59 996.4,2577.59 1014.81,2596 R12.1@1042.46,2596
NetR13_1: R13.1 U6.4 | length 58.5
  Bottom Layer w6.16: R13.1@928.54,2378 929.14,2378.6 U6.4@986.82,2378.6
NetR14_1: R14.1 R19.2 U9.1 | length 127.8
  Top Layer w6.16: U9.1@1216.31,913.6 1271.15,913.6 R19.2@1278,920.46 1337,920.46 R14.1@1340,923.46
NetR18_2: R18.2 U8.3 | length 59.8
  Bottom Layer w6.16: R18.2@638.87,2667 697.81,2667 U8.3@698.41,2666.4
NetR25_2: R25.2 RJ1.11 | length 74.9
  Bottom Layer w6.16: RJ1.11@2505.12,2822.91 2505.12,2760.61 R25.2@2514,2751.73
NetR26_2: R26.2 RJ1.14 | length 59.6
  Bottom Layer w6.16: R26.2@1980,2764.73 1983.46,2768.2 RJ1.14@1983.46,2822.91
NetR28_2: R28.2 U10.5 | length 214.2
  Top Layer w6.16: R28.2@788,607.67 789.97,607.67 801.65,619.35 801.65,621.32 826,645.67 826,672 846.65,692.65 U10.5@950.43,692.65
NetR31_2: R31.2 U10.13 | length 120.8
  Top Layer w6.16: R31.2@952.13,404.54 954.09,404.54 1001.61,452.06 U10.13@1001.61,503.67
NetR33_2: R33.2 U10.14 | length 103.8
  Top Layer w6.16: R33.2@1010.13,404.54 1021.3,415.72 U10.14@1021.3,503.67
NetR34_2: R34.2 U10.15 | length 112.3
  Top Layer w6.16: U10.15@1040.98,503.67 1040.98,431.59 1068.03,404.54 R34.2@1070,404.54
NetR35_2: R35.2 U10.16 | length 129.1
  Top Layer w6.16: U10.16@1060.67,503.67 1060.67,473.75 1115.35,419.07 1115.35,415.68 1127.03,404 R35.2@1129,404
NetR58_2: R58.2 U13.9 | length 40.6
  Top Layer w6.16: R58.2@418.53,247.54 420.07,246 U13.9@458.53,246
NetR60_1: R60.1 U12.7 | length 31.6
  Top Layer w6.16: U12.7@2323.46,1976.62 2353.35,1976.62
  Bottom Layer w6.16: v1(2362.27,1980.27) R60.1@2362.27,1982
NetR63_1: R63.1 U13.6 | length 140.2
  Top Layer w6.16: R63.1@421.73,543.46 423.69,543.46 458.63,508.52 483.78,508.52 508.53,483.77 U13.6@508.53,455.05
NetR65_1: R65.1 U13.5 | length 111.2
  Top Layer w6.16: R65.1@481.33,543.46 483.29,543.46 494.98,531.77 494.98,522.32 533.53,483.77 U13.5@533.53,455.05
NetR66_1: R66.1 U13.4 | length 96.9
  Top Layer w6.16: R66.1@540.93,543.46 542.89,543.46 558.53,527.83 U13.4@558.53,455.05
NetR67_1: R67.1 U13.3 | length 96.6
  Top Layer w6.16: U13.3@583.53,455.05 583.53,528.43 598.56,543.46 R67.1@600.53,543.46
NetR69_1: R69.1 U13.2 | length 110.9
  Top Layer w6.16: U13.2@608.53,455.05 608.53,483.77 646.47,521.72 646.47,531.77 658.16,543.46 R69.1@660.13,543.46
NetR71_1: R71.1 U13.1 | length 135.7
  Top Layer w6.16: U13.1@633.53,455.05 633.53,477.07 637.15,480.69 654.99,480.69 717.76,543.46 R71.1@719.73,543.46
NetR72_1: R72.1 U14.9 | length 102.3
  Top Layer w6.16: R72.1@523.4,908.46 535.09,896.77 545.65,896.77 580.16,862.27 U14.9@580.16,835.89
NetR73_1: R73.1 U14.8 | length 80.9
  Top Layer w6.16: R73.1@581.4,908 583.37,908 595.06,896.32 595.06,884.35 599.84,879.56 U14.8@599.84,835.89
NetR76_1: R76.1 U15.9 | length 111.2
  Top Layer w6.16: R76.1@381.53,907.33 393.21,895.65 411.46,895.65 446.84,860.27 U15.9@446.84,833.89
NetR77_2: R77.2 R81.2 U12.40 | length 56
  Top Layer w6.16: U12.40@2297.87,1856.54 2297.87,1831.87 v1(2320,1809.73)
NetR78_1: R78.1 U15.8 | length 83.9
  Top Layer w6.16: R78.1@441.65,907.33 441.86,907.33 453.54,895.65 453.54,886.98 466.53,874 U15.8@466.53,833.89
NetR79_2: R79.2 R80.2 U12.39 | length 50.6
  Top Layer w6.16: v1(2274.73,1809.73) R80.2@2276,1811 ; R80.2@2279,1809.73 2279,1843.58 2282.12,1846.7 U12.39@2282.12,1856.54
  Bottom Layer w6.16: R79.2@2274,1809.73 v1(2274.73,1809.73)
NetR82_2: R82.2 TP2.1 U12.20 | length 340.9
  Top Layer w6.16: v1(1931,2145) 2000,2145 2025.07,2170.07 2025.07,2171.6 2034.4,2180.93 2035.93,2180.93 2042.92,2187.92 2082.04,2187.92 2102.73,2167.23 2102.73,2155.27 2109.98,2148.02 2111.68,2148.02 2146.57,2113.13 2146.57,2068.87 2155.28,2060.16 2155.28,2050.31 U12.20@2156.13,2049.46
  Bottom Layer w6.16: v1(1931,2145) TP2.1@1931,2146
NetR84_1: R84.1 X3.1 | length 74.3
  Bottom Layer w6.16: X3.1@2203.54,140.66 2207.46,136.74 R84.1@2207.46,68
NetTP1_1: TP1.1 U12.23 | length 244.4
  Top Layer w6.16: v1(1965,2006.33) 1965,2009.46 1974.95,2019.41 1974.95,2026.32 v1(2015.69,2067.06) ; v1(2062,2070) 2065.57,2070 2097,2038.57 2097,2013.93 2113.83,1997.1 2115.97,1997.1 2120.7,1992.37 U12.23@2130.54,1992.37
  Bottom Layer w6.16: v1(2015.69,2067.06) 2017.9,2069.27 2022.27,2069.27 2023,2070 v1(2062,2070)
NetU13_7: U13.7 USB1.2 | length 921.2
  Top Layer w6.16: U13.7@483.53,455.05 483.53,483.77 468.94,498.36 405.36,498.36 318,411 318,121 566,-127 USB1.2@566,-171
NetU13_8: U13.8 USB1.3 | length 828.5
  Top Layer w6.16: U13.8@458.53,455.05 401.28,455.05 347.74,401.51 347.74,126.63 644.74,-170.37 USB1.3@644.74,-171
PHY2_MDI0N: D5.4 D5.7 RJ1.3 U12.10 | length 421
  Top Layer w5.24: U12.10@2323.46,2023.87 2325.04,2023.87 2328.3,2027.13 2328.62,2027.13 2328.62,2069.15 2337.23,2077.77 2339.09,2079.62 2339.09,2083.96 2327.11,2095.94 2327.11,2096.8 2334.9,2104.59 2335.77,2104.59 2353.01,2087.34 2353.88,2087.34 2361.67,2095.13 2361.67,2096 2344.42,2113.25 2344.42,2114.11 2352.21,2121.9 2353.07,2121.9 2370.32,2104.65 2371.19,2104.65 2378.98,2112.44 2378.98,2113.31 2368.69,2123.6 2368.69,2124.46 2376.48,2132.25 2377.35,2132.25 2382.36,2127.24 2386.7,2127.24 2395.73,2136.27 2403,2143.53 2403,2152.28 D5.4@2401.69,2153.6 D5.7@2401.69,2186 2401.69,2247.61 RJ1.3@2369.29,2280
PHY2_MDI0P: D5.5 D5.6 RJ1.2 U12.9 | length 421.4
  Top Layer w5.24: U12.9@2323.46,2008.12 2323.96,2008.63 2331.35,2008.63 2332.16,2009.44 2334.62,2009.44 2334.62,2011.89 2338.56,2011.89 2343.86,2017.19 2343.86,2062.84 2420.05,2139.03 2420.05,2152.28 D5.5@2421.37,2153.6 D5.6@2421.37,2186 2421.37,2194.52 2419.29,2196.6 RJ1.2@2419.29,2380
PHY2_MDI1N: D5.1 D5.10 RJ1.7 U12.13 | length 398.9
  Top Layer w5.24: RJ1.7@2169.29,2280 2215,2280 2256,2239 2319,2239 2342.63,2215.37 D5.10@2342.63,2186 D5.1@2342.63,2153.6 2342.63,2145.07 2304.98,2107.43 2302.7,2107.43 2266.37,2071.1 U12.13@2266.37,2049.46
PHY2_MDI1P: D5.2 D5.9 RJ1.4 U12.12 | length 398
  Top Layer w5.24: U12.12@2282.12,2049.46 2282.12,2071.1 2318.45,2107.43 2324.67,2107.43 2362.31,2145.07 D5.2@2362.31,2153.6 D5.9@2362.31,2186 2362.31,2220.28 2319.29,2263.31 2319.29,2287.91 2319.29,2290.53 2316.22,2293.6 2311.36,2293.6 2310.75,2294.21 2310.75,2305.23 2311.36,2305.84 2316.22,2305.84 2319.29,2308.91 2319.29,2335 RJ1.4@2319.29,2380
PHY2_MDI2N: D4.4 D4.7 RJ1.6 U12.16 | length 360.7
  Top Layer w5.24: U12.16@2219.13,2049.46 2219.13,2059.3 2219.13,2055.75 2217.81,2054.44 2216.78,2054.44 2216.78,2055.61 2215.95,2056.44 2215.95,2088.53 2222.13,2094.7 D4.4@2222.13,2144.15 D4.7@2222.13,2176.56 2221.71,2176.98 2221.71,2212.24 v1(2221.29,2212.66)
  Bottom Layer w5.24: RJ1.6@2219.29,2380 2219.29,2328.68 2203.47,2312.86 2203.47,2249.27 2223.37,2229.37 2223.37,2214.75 v1(2221.29,2212.66)
PHY2_MDI2P: D4.5 D4.6 RJ1.5 U12.15 | length 360.6
  Top Layer w5.24: U12.15@2234.87,2049.46 2234.87,2063.11 2234.05,2063.94 2234.05,2073.81 2234.05,2076.75 2234.89,2077.59 2234.89,2081.93 2232.37,2084.46 2232.37,2095.47 2232.98,2096.08 2252.19,2096.08 2252.8,2096.7 2252.8,2107.71 2252.19,2108.32 2244.88,2108.32 2241.81,2111.39 2241.81,2117 D4.5@2241.81,2144.15 D4.6@2241.81,2176.56 2243.05,2177.79 2243.05,2207.5 v1(2244.29,2208.74)
  Bottom Layer w5.24: v1(2244.29,2208.74) 2242.21,2210.82 2242.21,2237.18 2222.31,2257.08 2222.31,2305.05 2231.1,2313.85 2235.45,2313.85 RJ1.5@2269.29,2280
PHY2_MDI3N: D4.1 D4.10 RJ1.9 U12.19 | length 361
  Top Layer w5.24: RJ1.9@2069.29,2280 2069.29,2278.86 2098.08,2250.08 2116.42,2231.73 2116.42,2227.39 2108.48,2219.46 2108.48,2218.59 2116.27,2210.8 2117.13,2210.8 2128.19,2221.85 2129.05,2221.85 2136.84,2214.06 2136.84,2213.2 2115.12,2191.47 2115.12,2190.61 2122.91,2182.82 2123.77,2182.82 2142.38,2201.43 2146.72,2201.43 2148.58,2199.58 2163.07,2185.08 D4.10@2163.07,2176.56 D4.1@2163.07,2144.15 2164.39,2142.84 2164.39,2131.89 2165.04,2131.24 2165.04,2092.35 2171.88,2085.51 U12.19@2171.88,2049.46
PHY2_MDI3P: D4.2 D4.9 RJ1.8 U12.18 | length 361.9
  Top Layer w5.24: RJ1.8@2119.29,2380 2119.29,2246.1 2176.07,2189.32 2178.52,2189.32 2182.76,2185.08 D4.9@2182.76,2176.56 D4.2@2182.76,2144.15 2181.44,2142.84 2181.44,2131.89 2180.79,2131.24 2180.79,2098.88 2187.63,2092.04 U12.18@2187.63,2049.46
PHY_RXCLK/PHYAD1: R68.2 R108.1 U12.31 | length 51.9
  Top Layer w6.16: R68.2@2156.13,1804.6 U12.31@2156.13,1856.54
  other v1: 2159,1801.73
PHY_RXCLK/PHYAD2: R70.2 R109.2 U12.30 | length 76.2
  Top Layer w6.16: v1(2065,1856.5) 2066.58,1858.08 2096.65,1858.08 2120.7,1882.13 U12.30@2130.54,1882.13
PHY_RXD0/RXDLY: R59.2 R102.2 R103.1 U12.29 | length 105.1
  Top Layer w6.16: R59.2@2067,1897.88 U12.29@2130.54,1897.88
  Bottom Layer w6.16: R103.1@2025.42,1899 R102.2@2066.08,1899 v1(2067,1899)
PHY_RXD1/TXDLY: R61.2 R104.2 R105.1 U12.28 | length 116.9
  Top Layer w6.16: v1(2064.75,1941.5) 2081.07,1941.5 2108.08,1914.49 2129.69,1914.49 U12.28@2130.54,1913.63
  Bottom Layer w6.16: R105.1@2025.17,1941.5 v1(2064.75,1941.5)
PHY_RXD2/PLLOFF: R62.2 R106.1 U12.26 | length 81.6
  Top Layer w6.16: v1(2065,1984) 2071.76,1977.24 2082.33,1977.24 2113.58,1945.98 2129.69,1945.98 U12.26@2130.54,1945.13
PHY_RXD3/PHYD0: R64.2 R107.1 U12.25 | length 103.2
  Top Layer w6.16: v1(2065,2026) R64.2@2066,2025 ; R64.2@2066.25,2025.25 2071.76,2019.74 2071.76,2006.94 2081.92,1996.78 2081.92,1992.01 2112.2,1961.73 2129.69,1961.73 U12.25@2130.54,1960.87
  Bottom Layer w6.16: v1(2065,2026) R107.1@2065,2026.5
RESET: SW6.2 U1.44 | length 4177.9
  Top Layer w6.16: v1(1541,1355) 1541,1028 1559,1010 1728,1010 1742,996 1742,556 1763,535 1798,535 1806.76,543.76 1806.76,797.12 1830.11,820.47 1830.28,820.47 1837.75,827.94 U1.44@1855.47,827.94
  Bottom Layer w6.16: v1(-86.57,2777.15) 142.85,2777.15 151.7,2786 378,2786 504.92,2659.08 504.92,2383.08 643,2245 643,2167.61 660.37,2150.24 660.37,2146.21 669.7,2136.88 673.73,2136.88 682.61,2128 1402,2128 1541,1989 v1(1541,1355)
UART1_D+: R66.2 U14.1 | length 77.3
  Top Layer w6.16: R66.2@540.93,600.54 540.93,624.55 560.47,644.1 U14.1@560.47,669.75
UART1_D-: R67.2 U14.2 | length 78.8
  Top Layer w6.16: U14.2@580.16,669.75 580.16,620.91 586.87,614.2 586.87,612.23 598.56,600.54 R67.2@600.53,600.54
UART2_D+: R63.2 U15.1 | length 69.5
  Top Layer w6.16: R63.2@421.73,600.54 421.73,634.62 427.16,640.05 U15.1@427.16,667.75
UART2_D-: R65.2 U15.2 | length 82.6
  Top Layer w6.16: U15.2@446.84,667.75 447.77,666.82 447.77,632.13 479.36,600.54 R65.2@481.33,600.54
USB_DM: U13.10 USBC1.A7 USBC1.B7 | length 943.4
  Top Layer w6.16: v1(30.65,-321) 32,-322.35 32,-365 14.5,-382.5 14.5,-412.01 USBC1.B7@11.68,-414.83 11.68,-431.57 18.38,-438.27 18.38,-440.33 22.53,-444.47 40.21,-444.47 44.35,-440.33 44.35,-438.24 51.05,-431.54 USBC1.A7@51.05,-414.82 ; v1(481,195) 482.26,196.26 482.26,244.74 U13.10@483.53,246
  Bottom Layer w6.16: v1(30.65,-321) 30.65,-303.35 481,147 v1(481,195)
USB_DP: U13.11 USBC1.A6 USBC1.B6 | length 907.8
  Top Layer w6.16: USBC1.A6@31.37,-414.76 31.37,-398.02 38.06,-391.33 38.06,-389.25 42.21,-385.1 51.05,-385.1 ; v1(52.35,-321) 51,-322.35 51,-349 51.05,-349.05 51.05,-385.1 ; USBC1.B6@70.74,-414.76 70.74,-398.02 64.03,-391.32 64.03,-389.25 59.89,-385.1 51.05,-385.1 ; U13.11@508.53,246 509.26,245.26 509.26,195.74 v1(510,195)
  Bottom Layer w6.16: v1(52.35,-321) 53.81,-319.54 53.81,-309.19 510,147 v1(510,195)
XADC_V_N: R47.2 U4.2 | length 922.7
  Top Layer w6.16: R47.2@-372.54,-63 -372.54,47.35 -293.73,126.16 -8.84,126.16 162.84,297.84 162.84,395.96 144.24,414.56 U4.2@95.47,414.56
XADC_V_P: R39.2 U4.4 | length 1000.3
  Top Layer w6.16: R39.2@-374.54,-120 -374.54,-118.03 -350.7,-94.19 -350.7,35.3 -270,116 0.68,116 173,288.32 173,405.49 144.24,434.24 U4.4@95.47,434.24
pads on no net: *1.1 *2.1 *3.1 *4.1 *5.1 *6.1 *7.1 *8.1 D3.2 HDMI_A1.14 IC1.0 R40.3 R40.4 R40.5 RJ1.BO3 RJ1.BO4 U1. U2. U3. U4. U5.1 U5.6 U7.4 U10.17 U10.18 U10.19 U10.20 U10.21 U10.25 U10.26 U10.27 U10.28 U10.29 U10.30 U10.31 U10.32 U10.33 U10.42 U14.4 U14.5 U14.6 U15.4 U15.5 U15.6 USBC1. USBC1.A5 USBC1.A8 USBC1.B5 USBC1.B8
copper on no net: | length 49.4
  Bottom Layer w12: v1(1219,-333) 1222.5,-329.5 1222.5,-285.09

## Polygon pours and split planes (outlines as drawn)
GND on Top Layer "GND_L01_P001" (solid, remove dead copper, pour order 1): -887,3091 -884,3094 3041,3094 3041,-736 -899,-736 -899,3085 -893,3091
+5 on Layer 3 "+5_L03_P005" (solid, remove dead copper, pour order 5): -232,186 -225,179 -225,-396 -221,-396 -103,-514 -98,-509 133,-509 173,-469 164,-460 164,-297 97,-230 -55,-230 -55,146 154,355 154,827 1401,2074 1609,2074 1609,354 1680,283 1689,292 1871,292 1871,316 1942,387 1942,1162 1676,1428 1691,1443 1691,1746 1698,1746 1778,1826 1908,1826 1908,1843 1939,1874 1936,1877 1936,2156 1870,2156 1786,2240 1777,2231 1612,2231 1612,2517 1672,2577 1672,2704 1288,2704 1275,2717 1253,2695 1253,2414 1015,2176 -181,2176
+3.3_board on Layer 3 "+3.3_BOARD_L03_P007" (solid, remove dead copper, pour order 7): -894,3094 -894,-744 -903,-753 3071,-753 3071,3095 3036,3130
GND on Layer 2 "GND_L02_P006" (solid, remove dead copper, pour order 6): -938,3131 -938,-770 3082,-770 3099,-787 3105,-781 3105,3131
GND on Bottom Layer "GND_L04_P002" (solid, remove dead copper, pour order 2): -887,3091 -884,3094 3041,3094 3041,-736 -899,-736 -899,3085 -893,3091

## Other copper
Top Layer:
  rectangle net +3.3_board: 31,-205.8 116,-128
  pour cut-out: 1664.54,1805.63 1675,1795.16 1675,1423 1531,1423 1490,1382 1490,1063 1279,1063 929,713 929,610 1033,506 1033,298 1145,186 1259,186 2106,1033 2106,1720 1865,1961 1837.58,1933.58 1664.54,1933.58
  pour cut-out: 2010.5,687.5 2053.5,687.5 2488.5,252.5 2485.17,249.17 2485.17,150.62 2505.38,150.62 2644.5,11.5 2711.5,78.5 2711.5,865.5 2087.5,865.5 2080.5,872.5
  pour cut-out: 1923,2220 1920,2217 1921,2216 2560,2216 2560,3158 2546,3172 1923,3172
  pour cut-out: 2877.61,1594.5 2877.61,2611.39 2871,2618 2812,2559 2671,2559 2548,2436 1917,2436 1880,2399 1880,2255 1761,2136 1761,2064 1924,1901 1924,1456
  pour cut-out: 1174,38 1174,4 1115,-55 1174,-114 1174,-133 1222,-133 1263,-92 1263,19
  pour cut-out: -728,1437 -749,1416 -749,101 -540.75,309.25 -540.75,537.84 -182.84,537.84 -62,417 -62,391 4.67,391 8.67,387 87,387 87,936 46,977 -192,977 -218,1003 -224.5,996.5 -530.09,996.5 -530.09,1011.09 -569.34,1050.34 -549.66,1050.34 -474,1126 -489,1141 -489,1334
  pour cut-out: -181,2072 -181,1531.8 -46.2,1397 513,1397 513,1530 1382,2399 1345,2436 1345,2692 1196.49,2692 1046.12,2842.37 1025.75,2822 372,2822 372,2306 250,2184
Bottom Layer:
  pour cut-out: 1921.46,2208.74 2567.13,2208.74 2567.13,3168.13 2570,3171 2533,3208 1916,3208
  pour cut-out: 2123,-90 2109,-90 2061.27,-137.73 2061.27,-401.24 2067.11,-407.08 2208.27,-407.08 2247.27,-368.09 2251.72,-372.54 2519,-372.54 2519,-371 2580.85,-309.15 2580.85,177.15 2493,265 2489,261 2186,261 2186,-1.18 2136,-51.18
  pour cut-out: 1992,1377 2152,1217 2694,1217 2694,1086 2643,1035 2676,1002 2676,936 2750,936 2868,1054 2868,2009 2867,2010 2317,1460 2288,1460
  pour cut-out: 1363,3010 1363,2916 1502,2777 1649,2777 1741,2869 1732,2878 1732,3033 1398,3033 1396,3031
  pour cut-out: 550,2606 550,2366 697,2219 697,2144 1247,2144 1141,2250 1141,2682 1125,2698 588,2698

## Silkscreen, mask and mechanical layers (free items; w line width, h text height)
Top Overlay:
  drawing of 89 lines, arcs and shapes, not listed
  text "3V3 3V3 3V3 3V3 3V3 3V3 F18 E18 A16 A15 A14 A13 R2N R2P R0N N0P T2N T2P 20N T0P R1P R1N C1P C1N R3P R3N T3P T3N C0P C0N T1P T1N GND GND" at -654,2870 h25.5 r270
  text "GND GND GND GND GND C20 D20 C19 C18 B18 B17 C17 D17 B16  B15 C15 C14 C13 B13 E19 D19 E17 F16 E16 D16 D15 D14 E14 E13" at -603,2860 h25.5 r270
  text "RST" at -10,2709 h20 r270
  text "Internet" at 2642,2664 h60 r270
  text "LCD" at 501,2661 h60
  text "HDMI OUT" at 1196.06,2256.49 h60
  text "Xilinx XC7A35T" at 1931,1039 h60
  text "F14 F13 F15 3V3 5VV" at -499.54,575.65 h25.5 r270
  text "OV5640" at 1966,411 h60
  text "SD" at 1264,-23 h60
  text "USB" at 532,-74 h60
  text "XADC" at -203,-197 h60 r270
  text "+3.3" at 1699,-476 h20 r270
  text "+5" at 1906,-484 h20 r270
  text "GND R06 Y06 W07 Y07 Y08 W09 Y09 AB8 R02 R03 T03 AB18AA18AA19AB20N13 N14 P16 R17 R18 W20 W22 P20 V22 U22 U21 T21 N20 M20 N22 M22 3V3 5VV" at 2779,-494 h25.5 r90
  text "3V3 T06 V08 V09 T04 T05 U05 V04 V05 U06 U07 V07 N15 R14 P14 P15 R16 W17 V17 Y18 Y19 V20 U20 W21 M17 P17 N17 M18 L18 N18 N19 L21 GND GND" at 2822,-494 h25.5 r90
Mechanical 1:
  the board outline again, w10